# Altium PCB Telemetry_868MhzPCB.PcbDoc
Units mm, origin at the board's own origin, x right, y up, seen from the top; angles counter-clockwise.
Board outline 53.47 x 35.69 mm, 2 copper layers (Top Layer, Bottom Layer); 12 components, 9 nets, 45 pads, 8 vias.
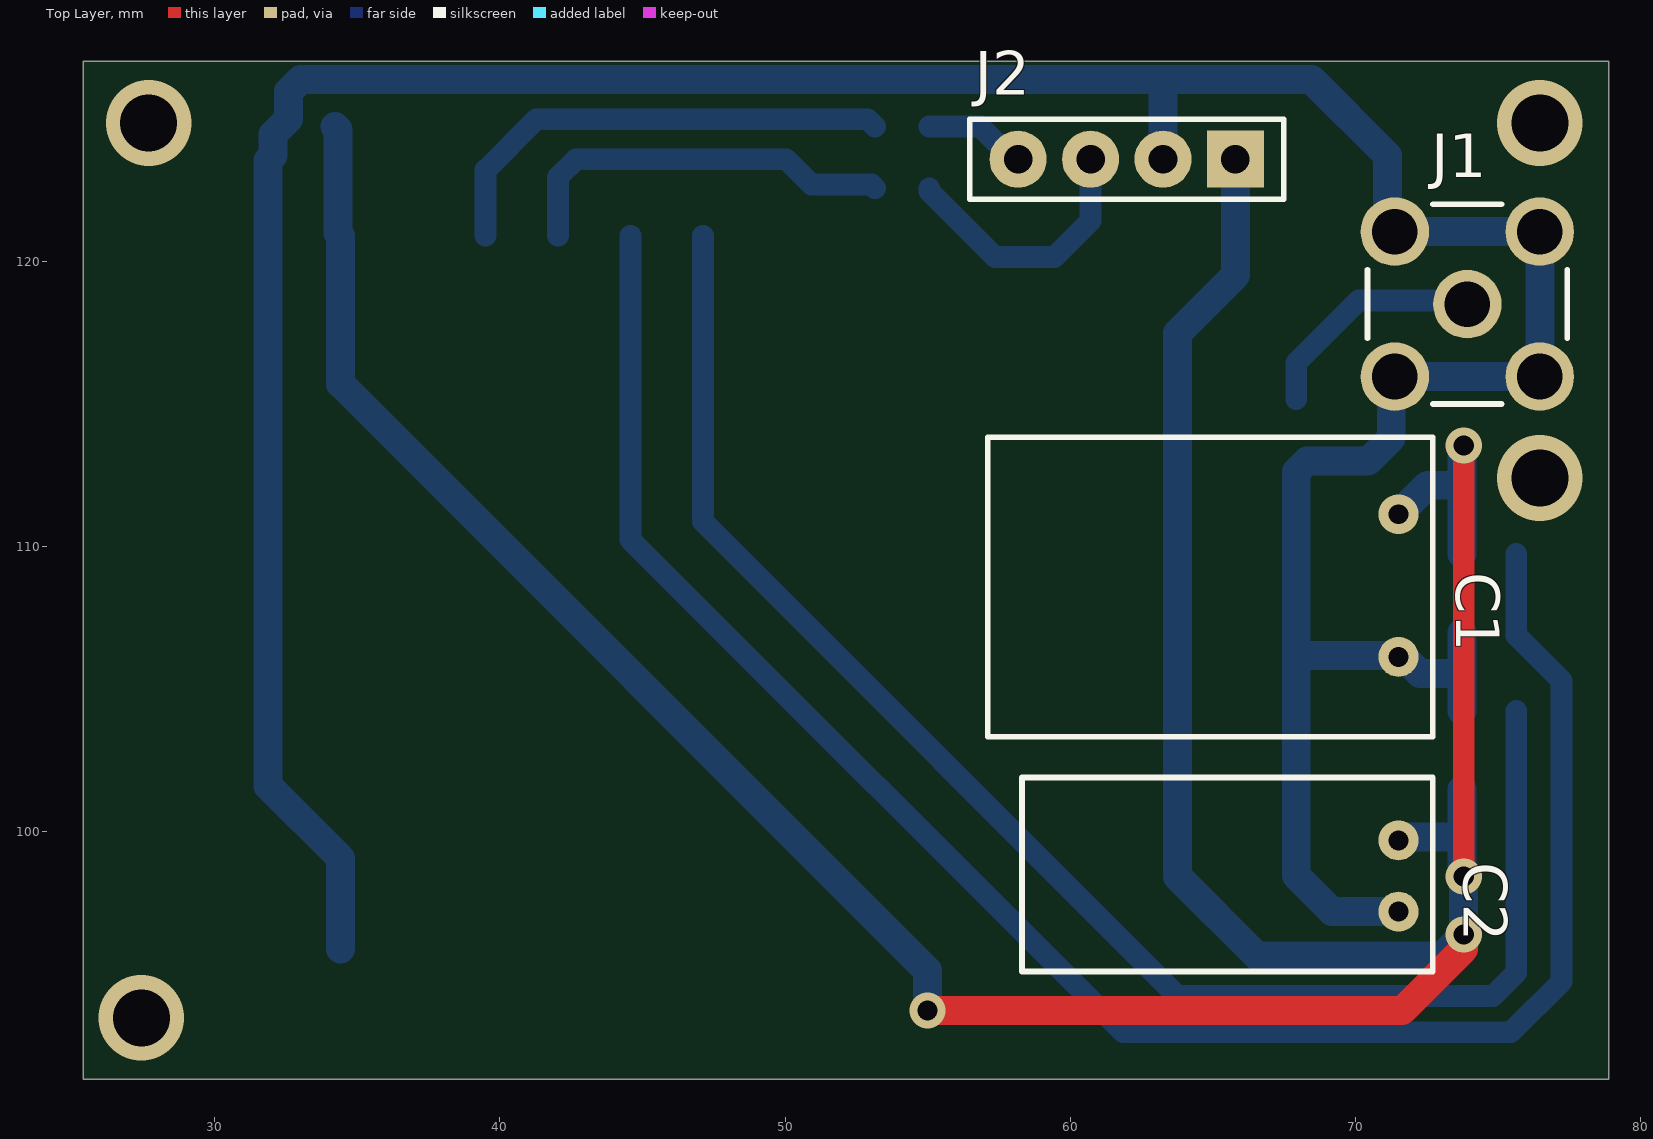
[diagram p0: Top Layer view]
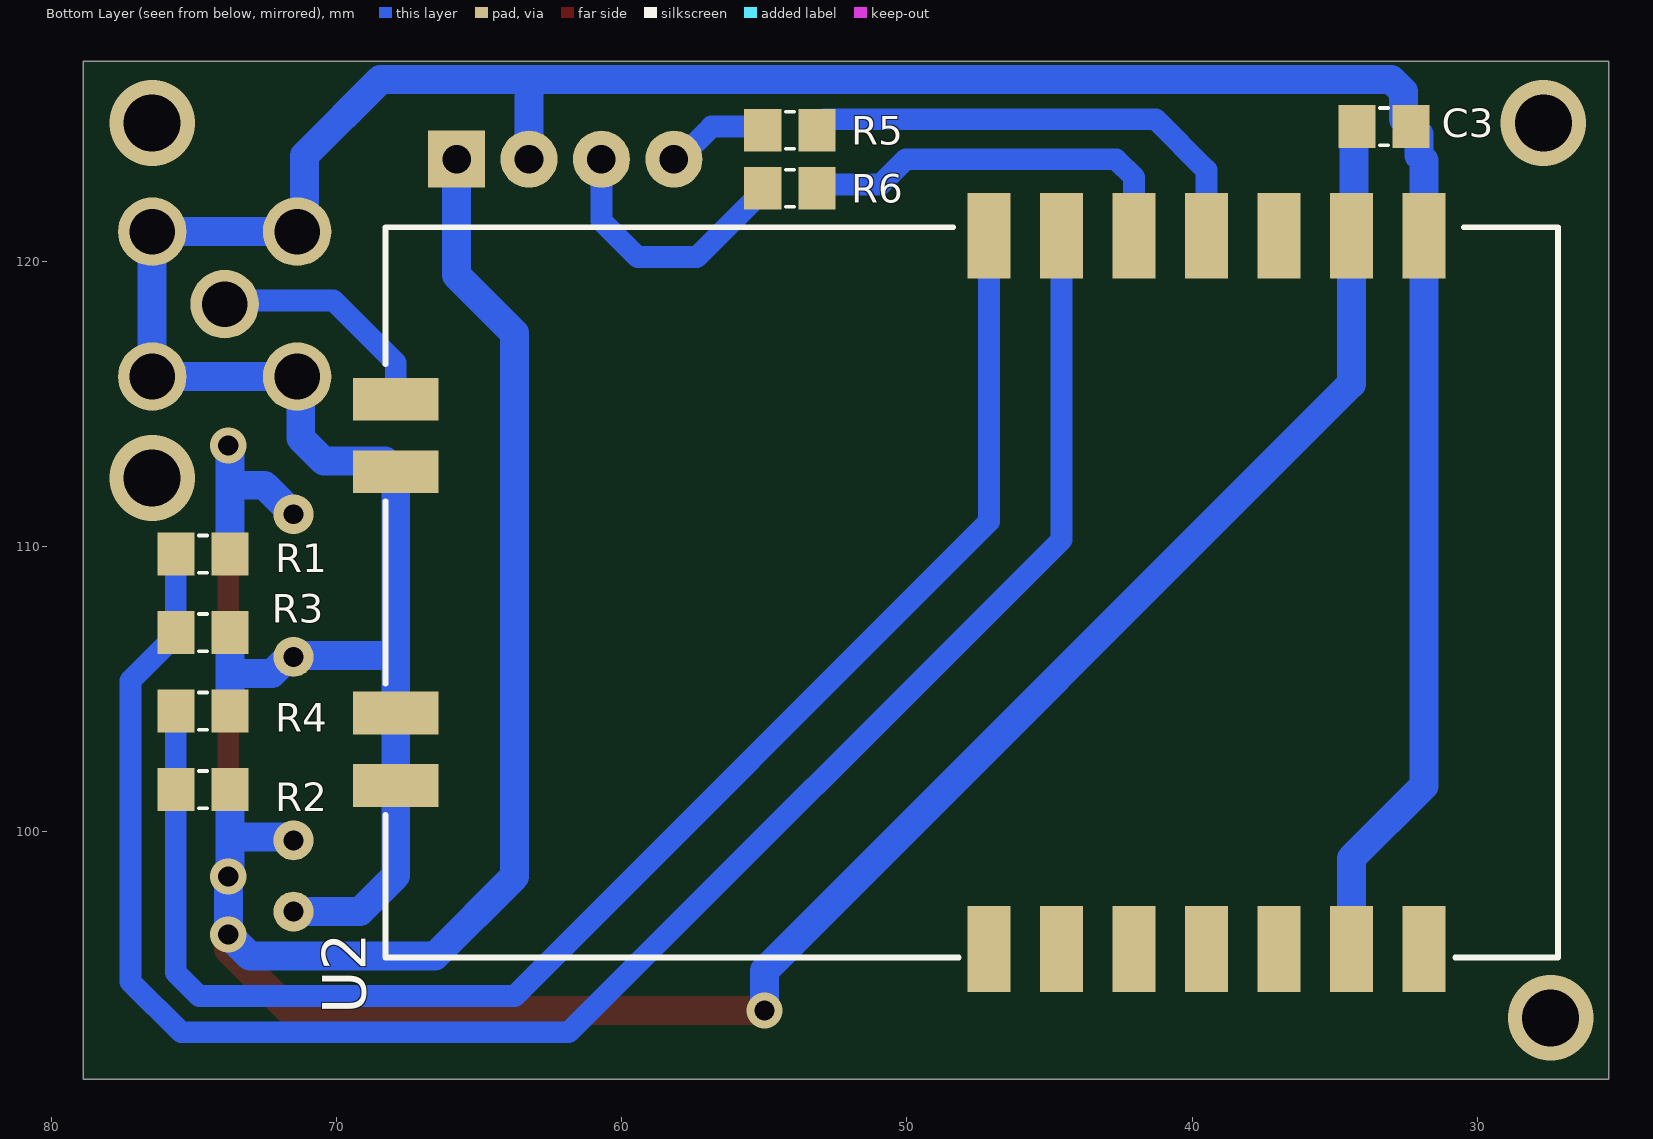
[diagram p1: Bottom Layer view, seen from below]
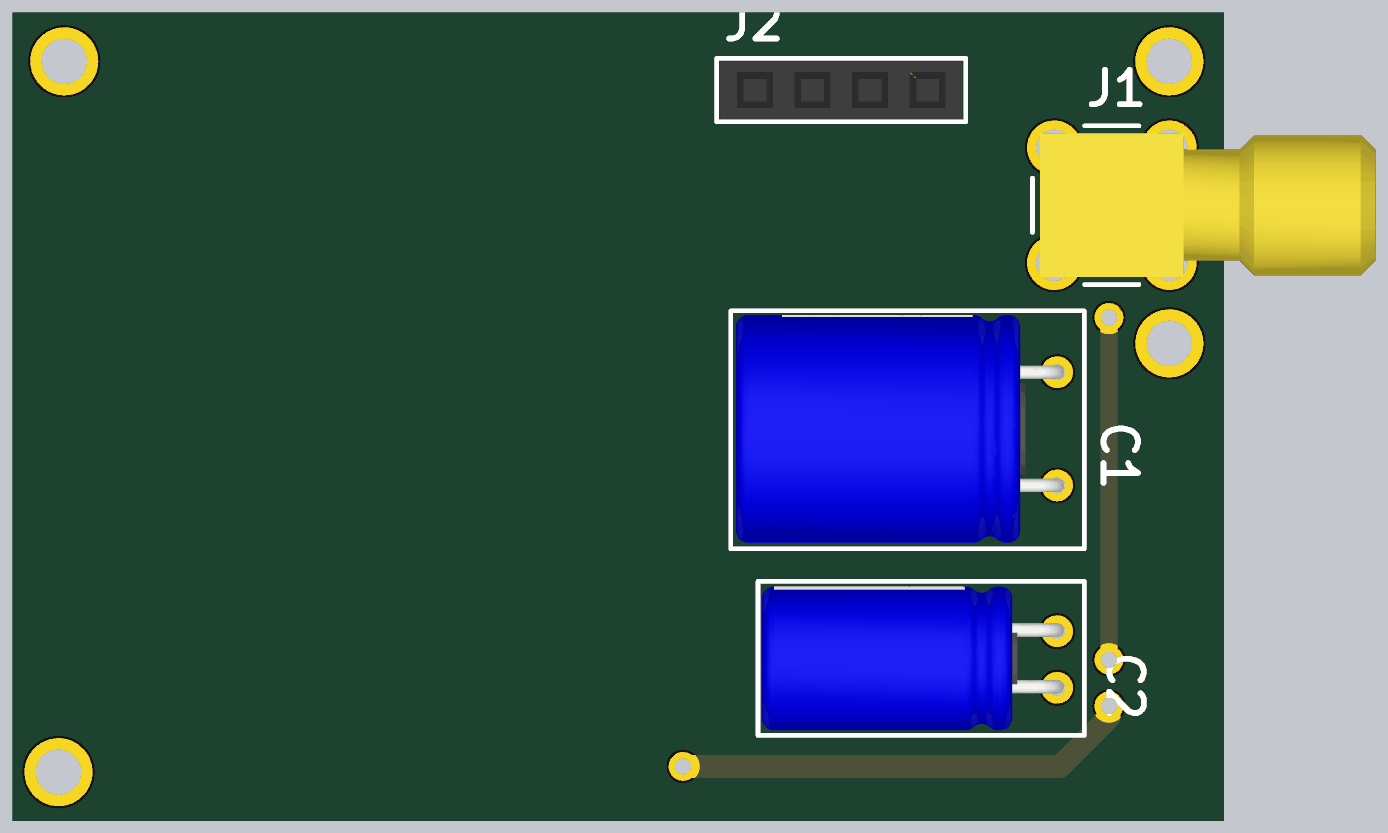
[diagram p2: 3D render of the assembled board from above, using the file's embedded part models]
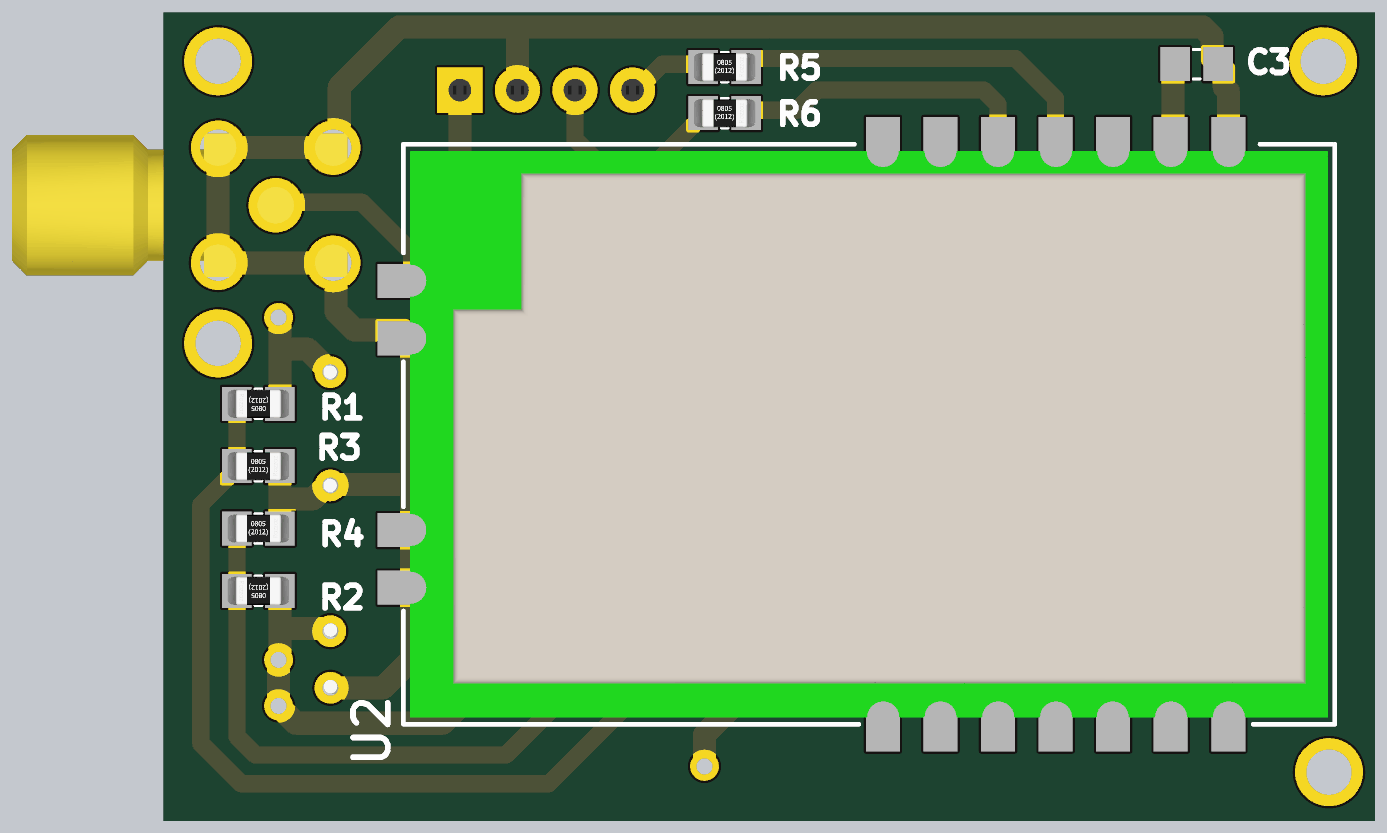
[diagram p3: 3D render of the assembled board from below, using the file's embedded part models]

## Layer stack, top to bottom
Top Solder: solder mask 0.0102, Solder Resist, Dk 3.5
Top Layer: signal copper 0.0356
Dielectric 1: dielectric 0.32, FR-4, Dk 4.8
Bottom Layer: signal copper 0.0356
Bottom Solder: solder mask 0.0102, Solder Resist, Dk 3.5

## Board outline
25.4,91.313 78.867,91.313 78.867,127 25.4,127

## Design rules (kind name [scope] priority, off if disabled: settings)
Clearance [All] p1: gap=0.254 ignorepadtopadclearanceinfootprint=FALSE except(0: Arc-Hole Track-Hole SMDPad-Hole THPad-Hole Via-Hole Fill-Hole Poly-Hole Region-Hole Text-Hole)
PolygonConnect [All] p1: connectstyle=Relief reliefconductorwidth=0.254 reliefentries=4 polygonreliefangle="90 Angle" airgapwidth=0.254
RoutingVias [All] p1: holewidth=0.711 width=1.27 viastyle="Through Hole" minholewidth=0.711 minwidth=1.27 maxholewidth=0.711 maxwidth=1.27
SolderMaskExpansion [All] p1: expansion=0.102
Width [All] p1: maxlimit=1.524 minlimit=0.254 preferedwidth=0.762 minimp=50.000000 maximp=50.000000 favimp=50.000000
30 further rules are at their usual default settings.

## Components (designator, comment, footprint, x,y, rotation, side; value= is the part's Value field where it differs from the comment)
C1 "470uF" PKLH-016V471MG125-T/A5.0 71.501,111.125 r270 top
C2 "100uF" PKRM-035V101ME110-T/A5.0 71.501,99.695 r270 top
C3 "0.1uF/50V" Cap_0805 33.274,124.714 r180 bottom
J1 "SmaConnector" RightAngled_SMA_Connector 73.914,118.491 r180 top
J2 "Header4Pin" Header_4pin_Female 65.786,123.571 r180 top
R1 "10k" RES_0805 74.676,109.728 r180 bottom
R2 "10k" RES_0805 74.676,101.473 r180 bottom
R3 "10k" RES_0805 74.676,106.976 r0 bottom
R4 "10k" RES_0805 74.676,104.225 r0 bottom
R5 "10k" RES_0805 54.102,124.587 r0 bottom
R6 "10k" RES_0805 54.102,122.555 r0 bottom
U2 "E22-900T30S" E22-900T30S 31.977,120.785 r270 bottom

## Footprints (in the part's own frame and the unit in brackets; to place one, negate y for a bottom-side part, rotate by r counter-clockwise, add the part's x,y. Pads: shape width x height; smd on the part's side, far side on the other; paste and mask are expansions set on the pad)
Cap_0805 [mm] "MLCC_Capacitor"
  rect 1.3x1.5 smd: 1(-0.95,0) 2(0.95,0)
  silkscreen extent -0.15,-0.65 0.15,0.65, body extent -1,-0.62 1,0.63, height 0.3
E22-900T30S [mm] "RF_Transceiver"
  rect 3x1.5 smd: 1(-0.1,-15.14) 2(-0.1,-12.6) 3(-0.1,-10.06) 4(-0.1,-7.52) 5(-0.1,-4.98) 6(-0.1,-2.44) 7(-0.1,0.1) 8(24.9,0.1) 9(24.9,-2.44) 10(24.9,-4.98) 11(24.9,-7.52) 12(24.9,-10.06) 13(24.9,-12.6) 14(24.9,-15.14)
  rect 1.5x3 smd: 15(19.17,-35.94) 16(16.63,-35.94) 17(8.17,-35.94) 18(5.63,-35.94)
  silkscreen extent -0.4,-36.3 25.2,4.8, body extent -0.1,-36 24.9,4.5, height 3.86
Header_4pin_Female [mm]
  rect 2x2 hole 1: 1(0,0)
  round 2 hole 1: 2(2.54,0) 3(5.08,0) 4(7.62,0)
  silkscreen extent -1.69,-1.4 9.31,1.4, body extent -1.52,-1.27 9.14,1.27, height 8.5
PKLH-016V471MG125-T/A5.0 [mm] "CAP.EL.470uF 16V 10x12.5 5MM 105C L.ESR 3000H TB K"
  round 1.4 hole 0.7: 1(0,0) 2(5,0)
  silkscreen extent -2.7,-14.4 7.8,1.2, body extent -2.53,-14.18 7.53,0.31, height 10.03
PKRM-035V101ME110-T/A5.0 [mm] "CAP.EL.100uF 35V 6.3x11MM 5MM 105C TB KOSHIN"
  round 1.4 hole 0.7: 1(0,0) 2(2.5,0)
  silkscreen extent -2.2,-13.2 4.6,1.2, body extent -1.98,-13.03 4.38,0.3, height 6.68
RES_0805 [mm] "SMD Resistor"
  rect 1.3x1.5 smd: 1(-0.95,0) 2(0.95,0)
  silkscreen extent -0.15,-0.65 0.15,0.65, body extent -1.4,-0.62 1.4,0.63, height 0.8
RightAngled_SMA_Connector [mm] "SMA_Connector"
  round 2.4 hole 1.6: 1(0,0) 2(2.54,-2.54) 3(2.54,2.54) 4(-2.54,2.54) 5(-2.54,-2.54)
  silkscreen extent -3.5,-3.5 3.5,3.5, body extent -11.63,-3.18 3.17,3.17, height 9.55

## Part data
C1: library part PKLH-016V471MG125-T/A5.0, "CAP.EL.470uF 16V 10x12.5 5MM 105C L.ESR 3000H TB K", ComponentLink1Description=özdisan, ComponentLink1URL=https://ozdisan.com/passive-components/capacitors/aluminum-capacitors/CK1H107M10010VR
C2: library part PKRM-035V101ME110-T/A5.0, "CAP.EL.100uF 50V 10x10 105C TH", ComponentLink1Description=özdisan, ComponentLink1URL=https://ozdisan.com/passive-components/capacitors/aluminum-capacitors/CK1H107M10010VR
C3: library part CL21B104JBCNNNC, "MLCC (2012) 0805 100nF 50VDC ±5% X7R"
J1: library part L-KLS1-SMA002-B, "RP-SMA Connector Receptacle, Male Pin 50Ohm Through Hole, Right Angle Solder", ComponentLink1Description=özdisan, ComponentLink1URL=https://ozdisan.com/connectors-and-interconnects/coaxial-connectors/sma-connectors/L-KLS1-SMA002-B
J2: library part Header_4Pin, "PIN HEADER 4PIN(1x4) 2.54mm THT V/T"
R1 R2 R3 R4 R5 R6: library part 0805S8J0103T5E, "RES.(2012) 0805 10K Ohms 5% 1/8W-S 100PPM"
U2: "LoRa, 868MHz 1W SMD long range, 5V Supply,RF Transmission 30 dBm, 10 k", ComponentLink1Description=M2M, ComponentLink1URL=https://www.m2mmarket.com.tr/lora-868mhz-1w-smd-long-range-5v-supplyrf-transmission-30-dbm-10-k-2153

## Via types
v1: diameter 3, hole 2, Top Layer to Bottom Layer, 4 vias
v2: diameter 1.27, hole 0.711, Top Layer to Bottom Layer, 4 vias

## Nets (pads, with @x,y where several pads share a name; then routed paths per layer and width w, separated by ;. In a path a pad name is that pad's centre, name@x,y a point inside that pad or via, vN(x,y) a via of type N, cw(c..) or ccw(c..) an arc to the next point about the centre after c; other vN are vias at no path point)
+3v3: C1.1 C2.1 C3.1 J2.1 R1.2 R2.2 U2.6 | length 126.3
  Top Layer w0.762: v2(73.787,98.425) v2(73.787,113.538)
  Top Layer w1.016: v2(54.991,93.726) 71.628,93.726 73.787,95.885 v2(73.787,96.393)
  Bottom Layer w1.016: C3.1 34.321,124.618 34.321,120.982 U2.6 34.417,115.697 54.991,95.123 v2(54.991,93.726) ; J2.1 65.786,119.507 63.754,117.475 63.754,98.425 66.548,95.631 73.025,95.631 v2(73.787,96.393) v2(73.787,98.425) 73.726,98.486 73.726,99.817 ; C2.1 71.623,99.817 73.726,99.817 ; C1.1 72.517,112.141 73.726,112.141 ; R2.2 73.726,99.817 ; R1.2 73.726,112.141 ; v2(73.787,113.538) 73.726,113.477 73.726,112.141
GND: C1.2 C2.2 C3.2 J1.2 J1.3 J1.4 J1.5 J2.2 R3.1 R4.1 U2.7 U2.9 U2.15 U2.16 U2.17 | length 125.3
  Bottom Layer w1.016: U2.9 34.417,99.06 31.877,101.6 U2.7 31.877,123.528 32.055,123.706 32.055,124.445 C3.2 32.593,124.983 32.593,125.938 33.02,126.365 63.246,126.365 ; J2.2@63.373,123.444 J2.2 63.246,126.365 ; C2.2 69.175,97.195 67.917,98.453 U2.15 U2.16 67.917,106.172 ; R4.1 73.726,105.6 ; R3.1 73.726,105.6 ; 63.246,126.365 68.453,126.365 71.109,123.709 71.109,121.296 J1.2 J1.5 J1.4 J1.3 71.247,115.824 71.247,113.792 70.439,112.984 68.286,112.984 U2.17 67.917,106.172 ; 67.917,106.172 71.454,106.172 C1.2 71.674,106.125 72.262,105.537 73.662,105.537 73.726,105.6
NetJ1_1: J1.1 U2.18 | length 8.2
  Bottom Layer w0.762: U2.18 67.917,116.431 70.104,118.618 73.787,118.618 J1.1
NetR1_1: R1.1 R3.2 U2.2 | length 66.8
  Bottom Layer w0.762: U2.2 44.577,110.236 61.849,92.964 75.438,92.964 77.216,94.742 77.216,105.286 75.626,106.876 R3.2 R1.1
NetR2_1: R2.1 R4.2 U2.1 | length 54.9
  Bottom Layer w0.762: U2.1 47.117,110.871 63.754,94.234 74.803,94.234 75.626,95.057 R2.1 R4.2
NetR5_1: R5.1 U2.4 | length 16.8
  Bottom Layer w0.762: U2.4 39.497,123.19 41.275,124.968 52.898,124.968 R5.1@53.152,124.714
NetR6_1: R6.1 U2.3 | length 13.8
  Bottom Layer w0.762: U2.3 42.037,122.936 42.672,123.571 50.038,123.571 50.927,122.682 53.025,122.682 R6.1
RX: J2.3 R6.2 | length 9.4
  Bottom Layer w0.762: R6.2 55.052,122.455 57.365,120.142 59.436,120.142 60.706,121.412 J2.3
TX: J2.4 R5.2 | length 3.6
  Bottom Layer w0.762: R5.2@55.052,124.714 56.845,124.714 57.988,123.571 J2.4
pads on no net: U2.5 U2.8 U2.10 U2.11 U2.12 U2.13 U2.14
copper on no net:
  other v1: 27.432,93.472 76.454,112.395 27.686,124.841 76.454,124.841